# Altium PCB FirebeetleNodoFinal.PcbDoc
Units mil, origin at the board's own origin, x right, y up, seen from the top; angles counter-clockwise.
Board outline 2565 x 3770 mil, 2 copper layers (Top Layer, Bottom Layer); 10 components, 19 nets, 73 pads, 4 vias.
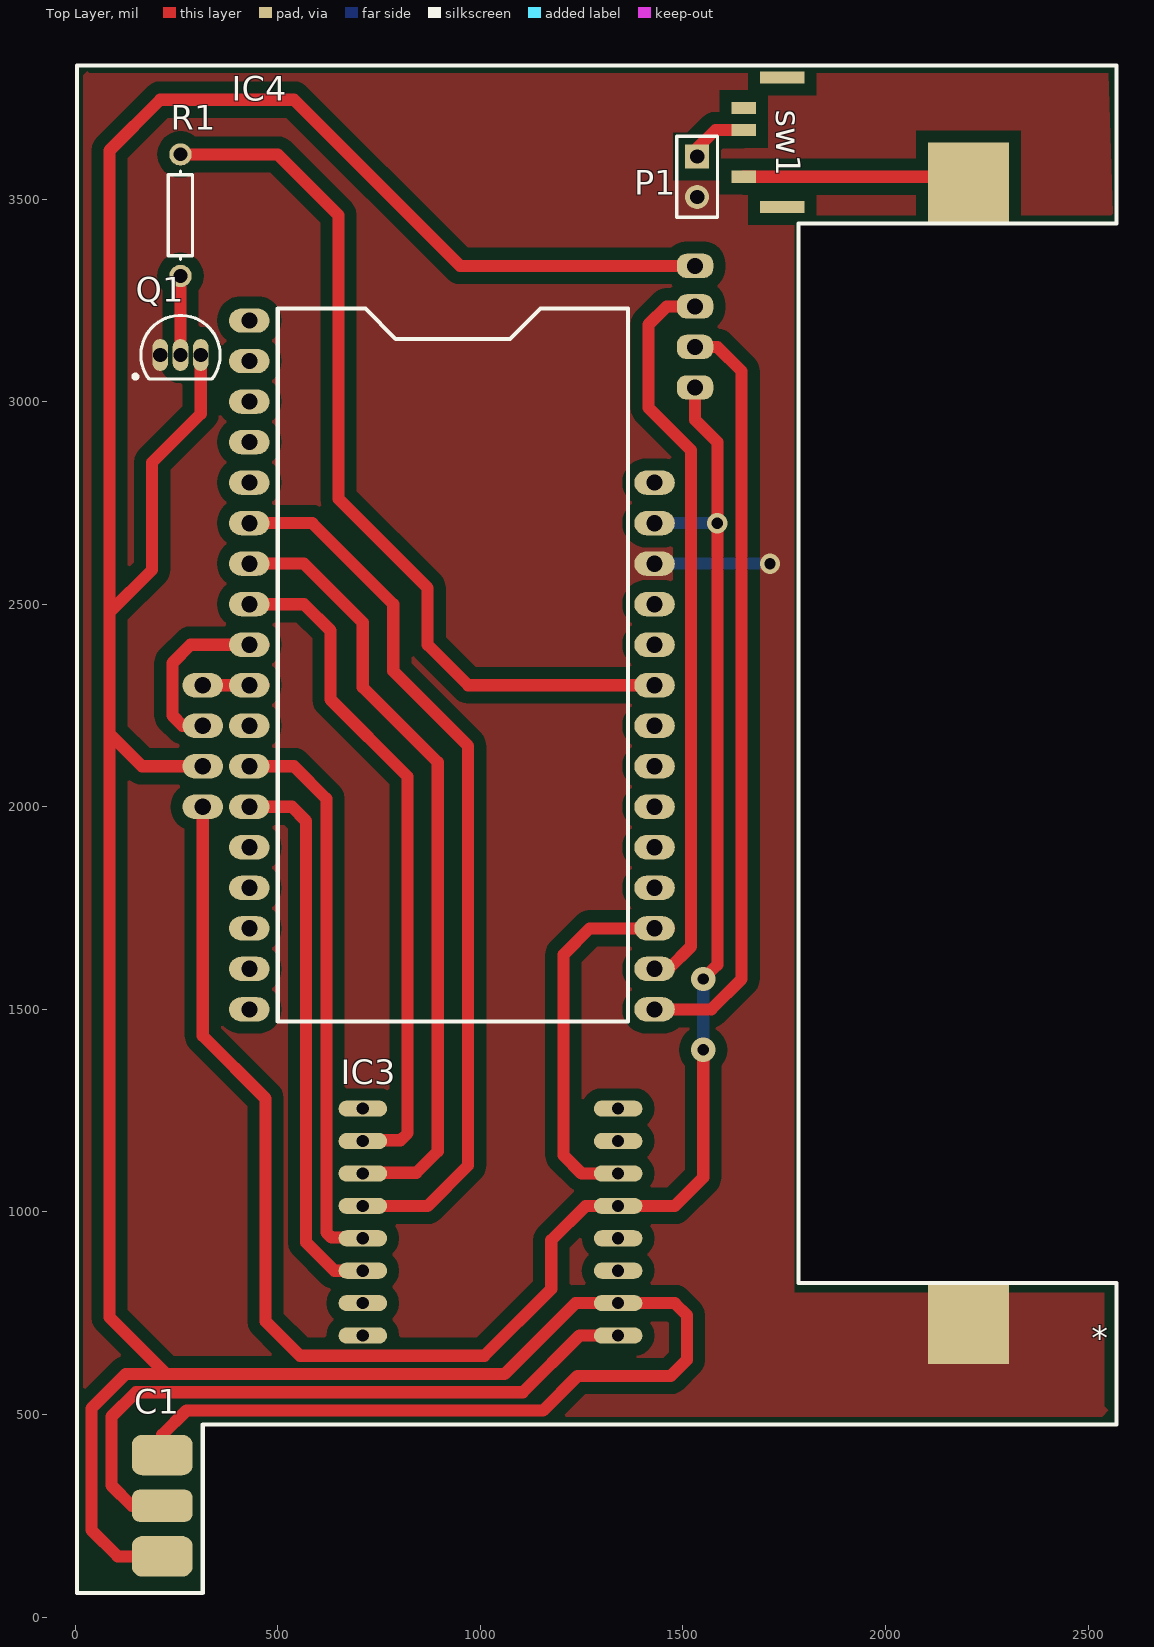
[diagram p0: Top Layer view]
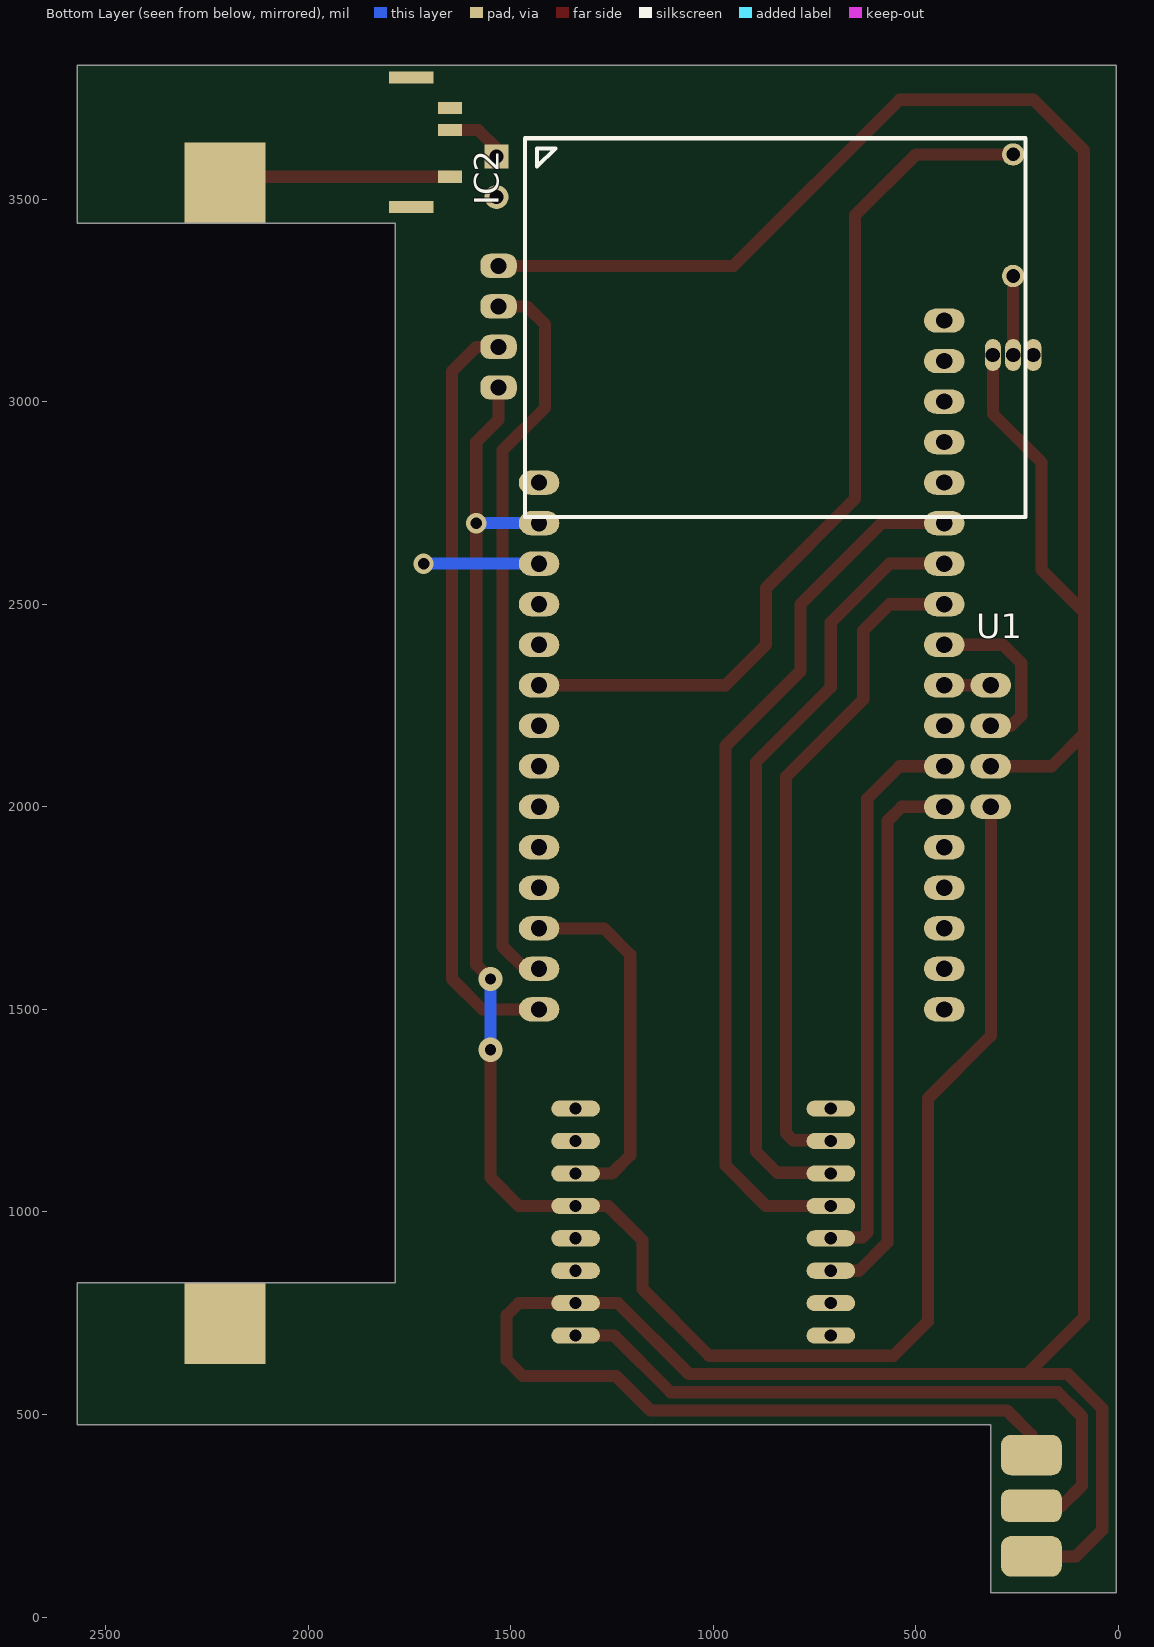
[diagram p1: Bottom Layer view, seen from below]

## Layer stack, top to bottom
Top Solder: solder mask 0.4, Solder Resist, Dk 3.5
Top Layer: signal copper 1.4
Dielectric 1: dielectric 12.6, FR-4, Dk 4.8
Bottom Layer: signal copper 1.4
Bottom Solder: solder mask 0.4, Solder Resist, Dk 3.5

## Board outline
5,60 5,1010 5,3830 2570,3830 2570,3440 1785,3440 1785,825 2570,825 2570,475 315,475 315,60

## Design rules (kind name [scope] priority, off if disabled: settings)
Clearance Clearance_7 [InNamedPolygon('GND_L01_P034')] p1: gap=30 ignorepadtopadclearanceinfootprint=FALSE
Clearance Clearance_6 [InNamedPolygon('MYGND')] p2: gap=20 ignorepadtopadclearanceinfootprint=FALSE
Clearance Clearance_5 [InNamedPolygon('GND_L01_P030')] p3: gap=10 ignorepadtopadclearanceinfootprint=FALSE except(0: Arc-Hole Track-Hole SMDPad-Hole THPad-Hole Via-Hole Fill-Hole Poly-Hole Region-Hole Text-Hole)
Clearance Clearance_4 [InNamedPolygon('GND_L01_P030')] p4: gap=20 ignorepadtopadclearanceinfootprint=FALSE
Clearance Clearance_3 [InNamedPolygon('GND_L01_P030')] p5: gap=30 ignorepadtopadclearanceinfootprint=FALSE
Clearance Clearance_1 [InNamedPolygon('GND_L01_P030')] p6: gap=20 ignorepadtopadclearanceinfootprint=FALSE
Clearance Clearance_2 [InNamedPolygon('GND_L01_P026')] p7: gap=20 ignorepadtopadclearanceinfootprint=FALSE
Clearance [All] p8: gap=10 ignorepadtopadclearanceinfootprint=FALSE except(0: Arc-Hole Track-Hole SMDPad-Hole THPad-Hole Via-Hole Fill-Hole Poly-Hole Region-Hole Text-Hole)
PlaneClearance [InNet('GND')] p1: clearance=40
PolygonConnect [All] p1: connectstyle=Direct reliefconductorwidth=10 reliefentries=4 polygonreliefangle="90 Angle" airgapwidth=10
RoutingVias [All] p1: holewidth=28 width=50 viastyle="Through Hole" minholewidth=28 minwidth=50 maxholewidth=28 maxwidth=50
SolderMaskExpansion [All] p1: expansion=4
Width [All] p1: maxlimit=30 minlimit=30 preferedwidth=30
29 further rules are at their usual default settings.

## Components (designator, comment, footprint, x,y, rotation, side; value= is the part's Value field where it differs from the comment)
* "Li18650" Li18650 2195,3420 r180 top
C1 "SMA" SMA 215,175 r0 top
IC2 "NEO6M" NEO6M 1530,3335 r270 bottom
IC3 "RFM95W" RFM95W 710,695 r0 top
IC4 "FIREBEETLE" FIREBEETLE 1430,2800 r180 top
P1 "Header 2" HDR1X2 1535,3605 r270 top
Q1 "2N3904" TO-92A 260,3115 r270 top
R1 "Res1" AXIAL-0.3 260,3460 r90 top value=1.5K
sw1 "Sw" InterruptorSMD 1650,3725 r270 top
U1 "MLX90614" IRSENSOR 315,2000 r90 bottom

## Footprints (in the part's own frame and the unit in brackets; to place one, negate y for a bottom-side part, rotate by r counter-clockwise, add the part's x,y. Pads: shape width x height; smd on the part's side, far side on the other; paste and mask are expansions set on the pad)
AXIAL-0.3 [mm] "Axial Device, Thru-Hole; 2 Leads; 0.3 in Pin Spacing"
  round 1.4 hole 0.85: 1(-3.81,0) 2(3.81,0)
  silkscreen extent -2.77,-0.76 2.77,0.76
FIREBEETLE [mil]
  oval 100x60 hole 40: 1(0,0) 2(0,100) 3(0,200) 4(0,300) 5(0,400) 6(0,500) 7(0,600) 8(0,700) 9(0,800) 10(0,900) 11(0,1000) 12(0,1100) 13(0,1200) 14(0,1300) 15(1000,1300) 16(1000,1200) 17(1000,1100) 18(1000,1000) 19(1000,900) 20(1000,800) 21(1000,700) 22(1000,600) 23(1000,500) 24(1000,400) 25(1000,300) 26(1000,200) 27(1000,100) 28(1000,0) 29(1000,-100) 30(1000,-200) 31(1000,-300) 32(1000,-400)
  silkscreen extent 65,-430 930,1330, body extent -32,-912 1028,1496, height 163
HDR1X2 [mm] "Connector; Header; 2 Position"
  rect 1.5x1.5 hole 0.9: 1(0,0)
  round 1.5 hole 0.9: 2(2.54,0)
  silkscreen extent -1.27,-1.27 3.81,1.27
InterruptorSMD [mil]
  rect 30x60 all layers, no hole: 1(0,0) 2(55,0) 3(170,0)
  rect 30x110 all layers, no hole: 4(-75,95) 4(245,95)
  body extent -72,0 242,244, height 56
IRSENSOR [mil]
  oval 60x100 hole 40: 1(0,0) 2(100,0) 3(200,0) 4(300,0)
  body extent -86,-50 386,619, height 533
Li18650 [mil]
  rect 200x200 all layers, no hole: 1(-10,-120) 2(-10,2695)
  body extent -372,-95 352,2669, height 362
NEO6M [mil]
  rrect80% 60x90 hole 40: 1(0,0) 2(100,0) 3(200,0) 4(300,0)
  silkscreen extent -315,65 620,1300, body extent -330,-79 635,1359, height 169
RFM95W [mil]
  oval 120x40 hole 30: 1(0,0) 2(0,80) 3(0,160) 4(0,240) 5(0,320) 6(0,400) 7(0,480) 8(0,560) 9(630,560) 10(630,480) 11(630,400) 12(630,320) 13(630,240) 14(630,160) 15(630,80) 16(630,0)
  body extent -10,-40 620,590, height 80
SMA [mil]
  rrect50% 150x100 all layers, no hole: 1(0,-25) 3(0,225)
  rrect50% 150x80 all layers, no hole: 2(0,100)
  body extent -57,-100 2484,297, height 197
TO-92A [mm] "TO, Flat Index; 3 In-Line, Axial Leads; Body Dia. 4.5mm; Leads 0.51 x 0.48 mm (max)"
  oval 2x1 hole 0.9: 1(0,-1.27) 2(0,0) 3(0,1.27)
  silkscreen extent -2.48,-2.95 1.5,2.48, body extent -2.48,-2.5 1.5,2.5, height 6.86

## Part data
IC2: "GPS NEO6M"
P1: "Header, 2-Pin", LatestRevisionDate=17-Jul-2002, LatestRevisionNote="Re-released for DXP Platform.", Publisher="Altium Limited"
Q1: "NPN General Purpose Amplifier", ComponentLink1Description="Manufacturer Link", ComponentLink1URL=http://www.fairchildsemi.com/, ComponentLink2Description=Datasheet, ComponentLink2URL=http://www.fairchildsemi.com/ds/2N%2F2N3904.pdf, DatasheetVersion=1997, LatestRevisionDate=15-Jan-2003, LatestRevisionNote="PCB Footprint 'BCY-W3/D4.7' replaced", PackageDescription="TO, Flat Index; 3 In-Line, Axial Leads; Body Dia. 4.5mm; Leads 0.51 x 0.48 mm (max)", PackageReference=TO-92A, PackageVersion=Sep-1998, Published=8-Jun-2000, Publisher="Altium Limited"
R1: "Resistor", LatestRevisionDate=17-Jul-2002, LatestRevisionNote="Re-released for DXP Platform.", PackageDescription="Axial Device, Thru-Hole; 2 Leads; 0.3 in Pin Spacing", PackageReference=AXIAL-0.3, Published=8-Jun-2000, Publisher="Altium Limited"
U1: "iR SENSOR TEMPERATURA"

## Via types
v1: diameter 50, hole 28, Top Layer to Bottom Layer, 2 vias
v2: diameter 60, hole 28, Top Layer to Bottom Layer, 2 vias

## Nets (pads, with @x,y where several pads share a name; then routed paths per layer and width w, separated by ;. In a path a pad name is that pad's centre, name@x,y a point inside that pad or via, vN(x,y) a via of type N, cw(c..) or ccw(c..) an arc to the next point about the centre after c; other vN are vias at no path point)
3V3: IC2.4 IC3.12 IC4.2 U1.1 | length 4844.2
  Top Layer w30: U1.1 315,1435 470,1280 470,730 555,645 1010,645 1175,810 1175,930 1260,1015 IC3.12 1480,1015 1550,1085 v2(1550,1400) ; IC2.4 1530,2955 1585,2900 1585,1610 v2(1550,1575)
  Bottom Layer w30: IC4.2 v1(1585,2700) ; v2(1550,1400) v2(1550,1575)
3V3GPS: IC4.31
DIO0: IC3.11 IC4.12 | length 935.6
  Top Layer w30: IC3.11 1250,1095 1205,1140 1205,1635 1270,1700 IC4.12@1465,1700
GND: *.2 IC4.3 P1.2 Q1.1 | length 285
  Bottom Layer w30: IC4.3 v1(1715,2600)
gnd_aux: C1.1 C1.3 IC2.1 IC3.1 IC3.8 IC3.15 Q1.3 U1.2 | length 9403.7
  Top Layer w30: C1.1@205,150 C1.1@215,160 ; C1.3 215,450 275,510 1155,510 1240,595 1470,595 1510,635 1510,745 1480,775 IC3.15 1235,775 1060,600 225,600 ; C1.1@245,150 105,150 40,215 40,515 125,600 225,600 ; Q1.3 310,2970 190,2850 190,2585 85,2480 ; U1.2 165,2100 85,2180 ; IC2.1 950,3335 540,3745 210,3745 85,3620 85,2480 ; 85,2180 85,740 225,600 ; 85,2180 85,2480
MISO: IC3.7 IC4.25 | length 1630.1
  Top Layer w30: IC4.25@465,2500 565,2500 630,2435 630,2265 820.66,2074.34 820.66,1194.49 803.09,1176.91 711.91,1176.91 IC3.7
MOSI: IC3.6 IC4.26 | length 1894.5
  Top Layer w30: IC4.26@465,2600 565,2600 710,2455 710,2295 895,2110 895,1150 841.91,1096.91 711.91,1096.91 IC3.6
Net*_1: *.1 sw1.3 | length 555
  Top Layer w30: sw1.3 *.1@2205,3555
NetC1_2: C1.2 IC3.16 | length 1688.6
  Top Layer w30: C1.2@255,275 C1.2 140,275 90,325 90,495 150,555 1105,555 1245,695 IC3.16
NetP1_1: P1.1 sw1.2 | length 153.6
  Top Layer w30: P1.1 1535,3625 1580,3670 sw1.2
NetQ1_2: Q1.2 R1.1 | length 195
  Top Layer w30: Q1.2 R1.1
NSS: IC3.4 IC4.21 | length 1354.7
  Top Layer w30: IC4.21@465,2100 540,2100 620,2020 620,949.49 632.57,936.91 708.09,936.91 IC3.4
RST: IC3.3 IC4.20 | length 1328.5
  Top Layer w30: IC4.20@465,2000 535,2000 570,1965 570,925 640,855 IC3.3
RX: IC2.2 IC4.13 | length 1789.9
  Top Layer w30: IC4.13@1465,1600 1520,1655 1520,2880 1415,2985 1415,3190 1460,3235 IC2.2
SCK: IC3.5 IC4.27 | length 2165.9
  Top Layer w30: IC4.27@465,2700 585,2700 785,2500 785,2335 970,2150 970,1115 870,1015 IC3.5
SCL: IC4.24 U1.3 | length 484
  Top Layer w30: U1.3@340,2200 U1.3 265,2200 240,2225 240,2355 285,2400 IC4.24@465,2400
SDA: IC4.23 U1.4 | length 125
  Top Layer w30: U1.4@340,2300 IC4.23@465,2300
TX: IC2.3 IC4.14 | length 1850.9
  Top Layer w30: IC4.14@1465,1500 1570,1500 1645,1575 1645,2850 1645,3075 1585,3135 IC2.3
VextGPIO: IC4.6 R1.2 | length 2204.7
  Top Layer w30: R1.2 500,3610 650,3460 650,2760 870,2540 870,2400 970,2300 IC4.6
pads on no net: IC3.2 IC3.9 IC3.10 IC3.13 IC3.14 IC4.1 IC4.4 IC4.5 IC4.7 IC4.8 IC4.9 IC4.10 IC4.11 IC4.15 IC4.16 IC4.17 IC4.18 IC4.19 IC4.22 IC4.28 IC4.29 IC4.30 IC4.32 sw1.1 sw1.4

## Polygon pours and split planes (outlines as drawn)
GND on Top Layer "GND_L01_P034" (solid, pour order 34): 2550,3810 35,3810 30,3815 20,3805 20,110 280,110 295,95 300,100 300,495 2535,495 2550,510 2540,520 2540,800 1785,800 1775,800 1775,860 1775,3460 2560.45,3460

## Silkscreen, mask and mechanical layers (free items; w line width, h text height)
Top Overlay:
  the board outline again, w10